# Altium PCB ESC.PcbDoc
Units mil, origin at the board's own origin, x right, y up, seen from the top; angles counter-clockwise.
Board outline 1450.03 x 2040.03 mil, 4 copper layers (Component Side, Ground Plane, Power Plane, Solder Side), stack 33.234 mil thick; 110 components, 77 nets, 463 pads, 385 vias.
Unrouted connection lines stored in the file: 36.
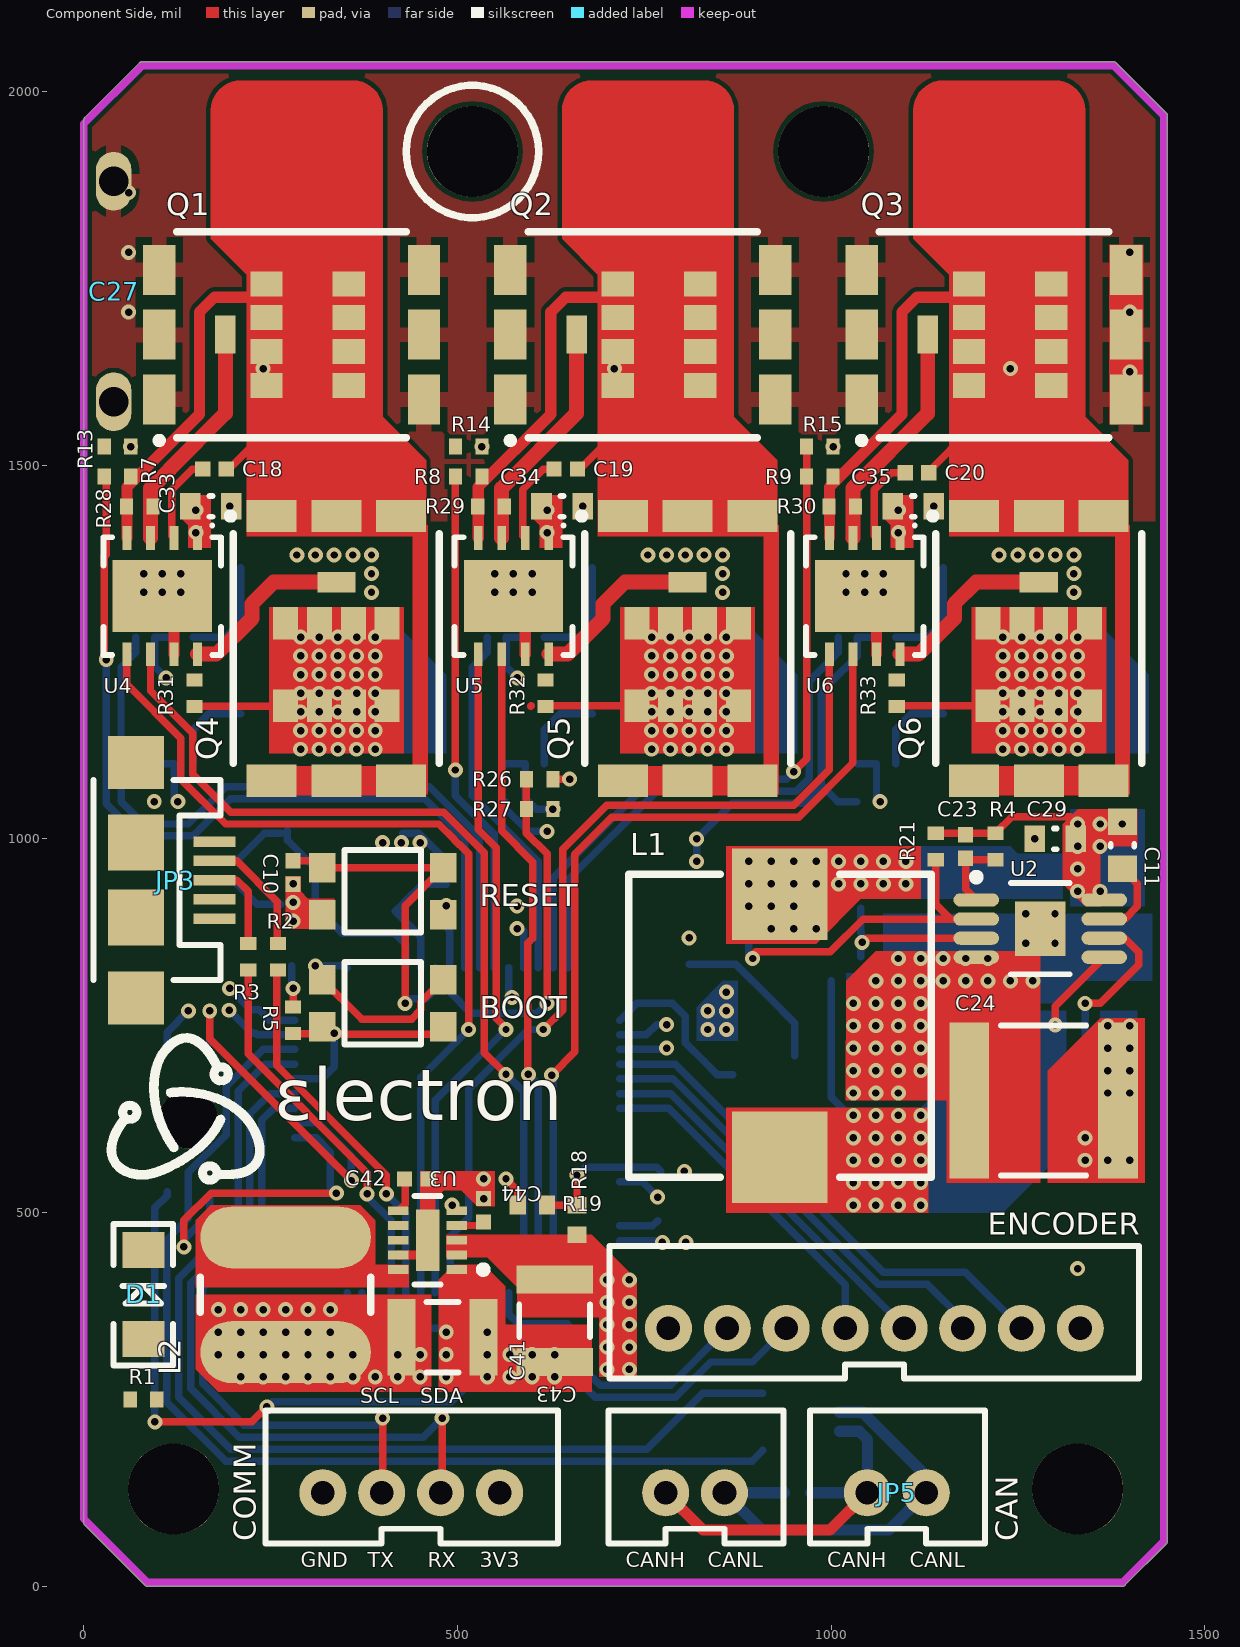
[diagram p0: Component Side view]
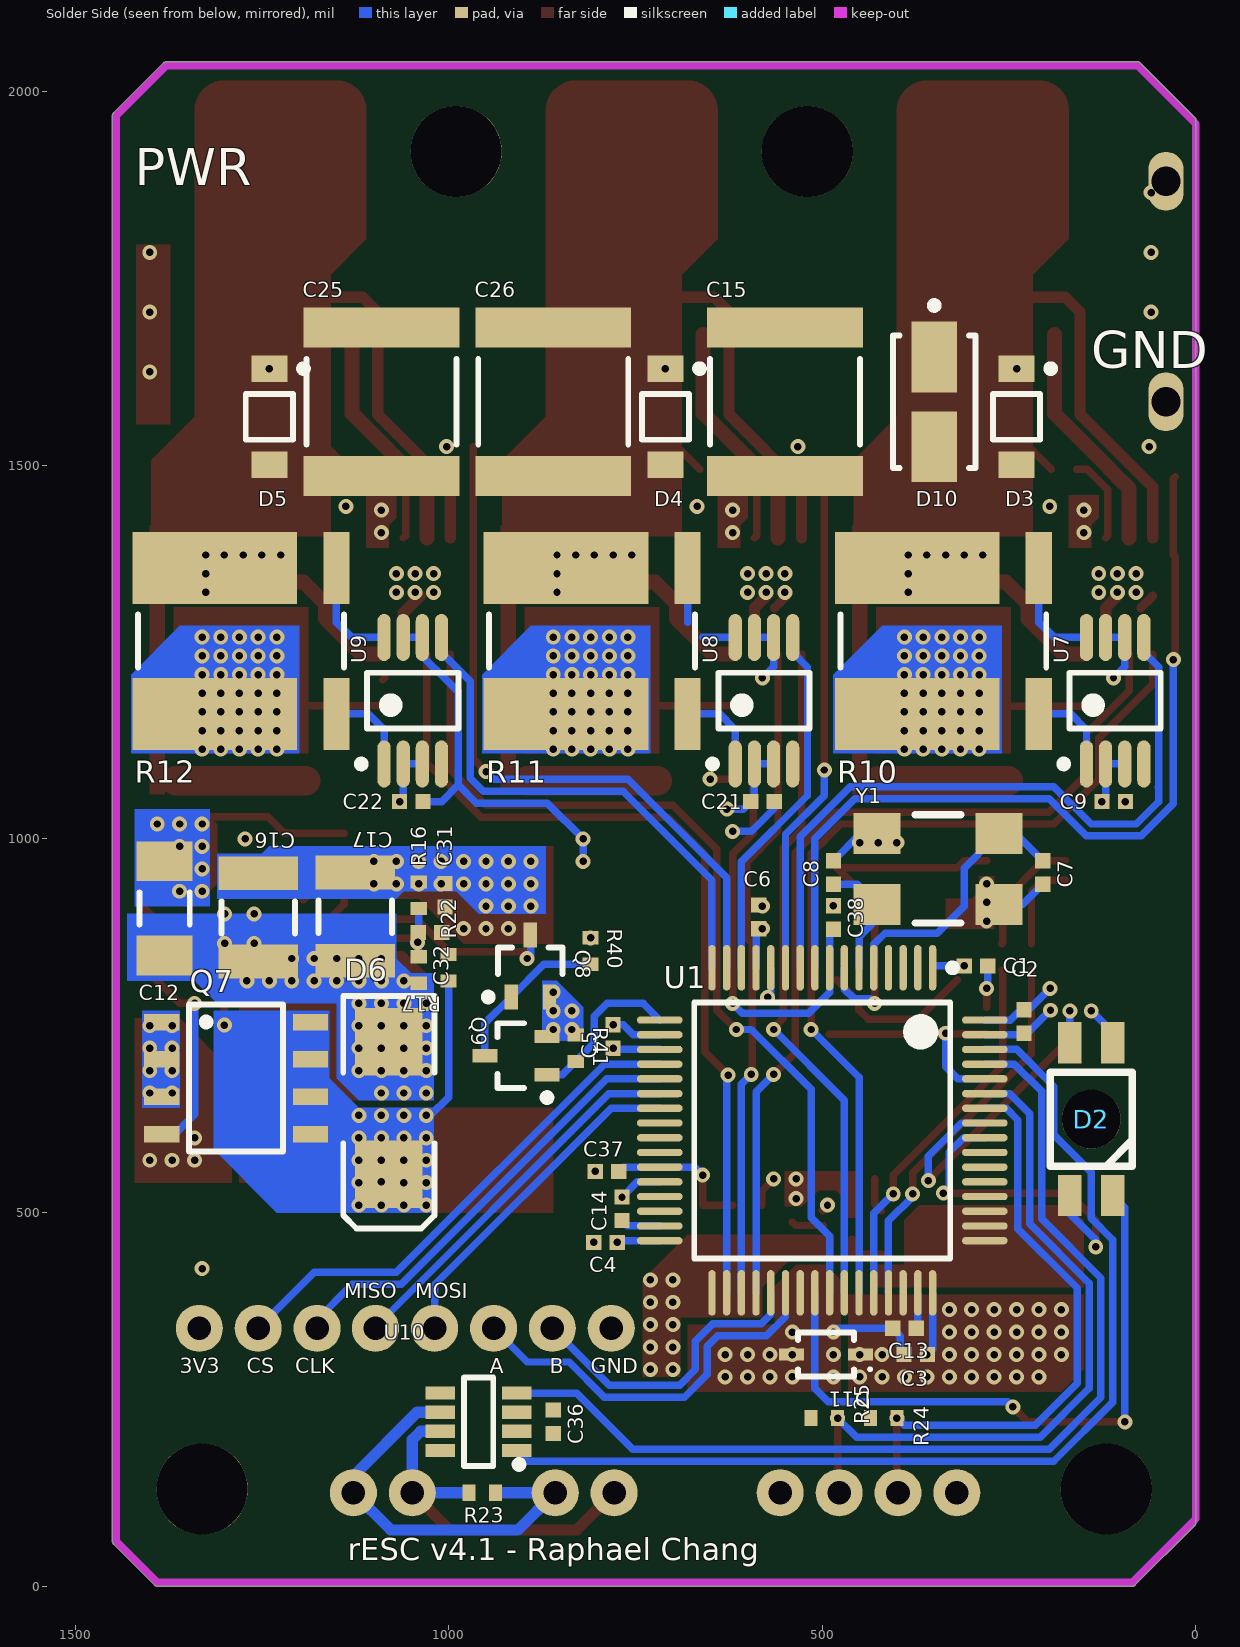
[diagram p1: Solder Side view, seen from below]
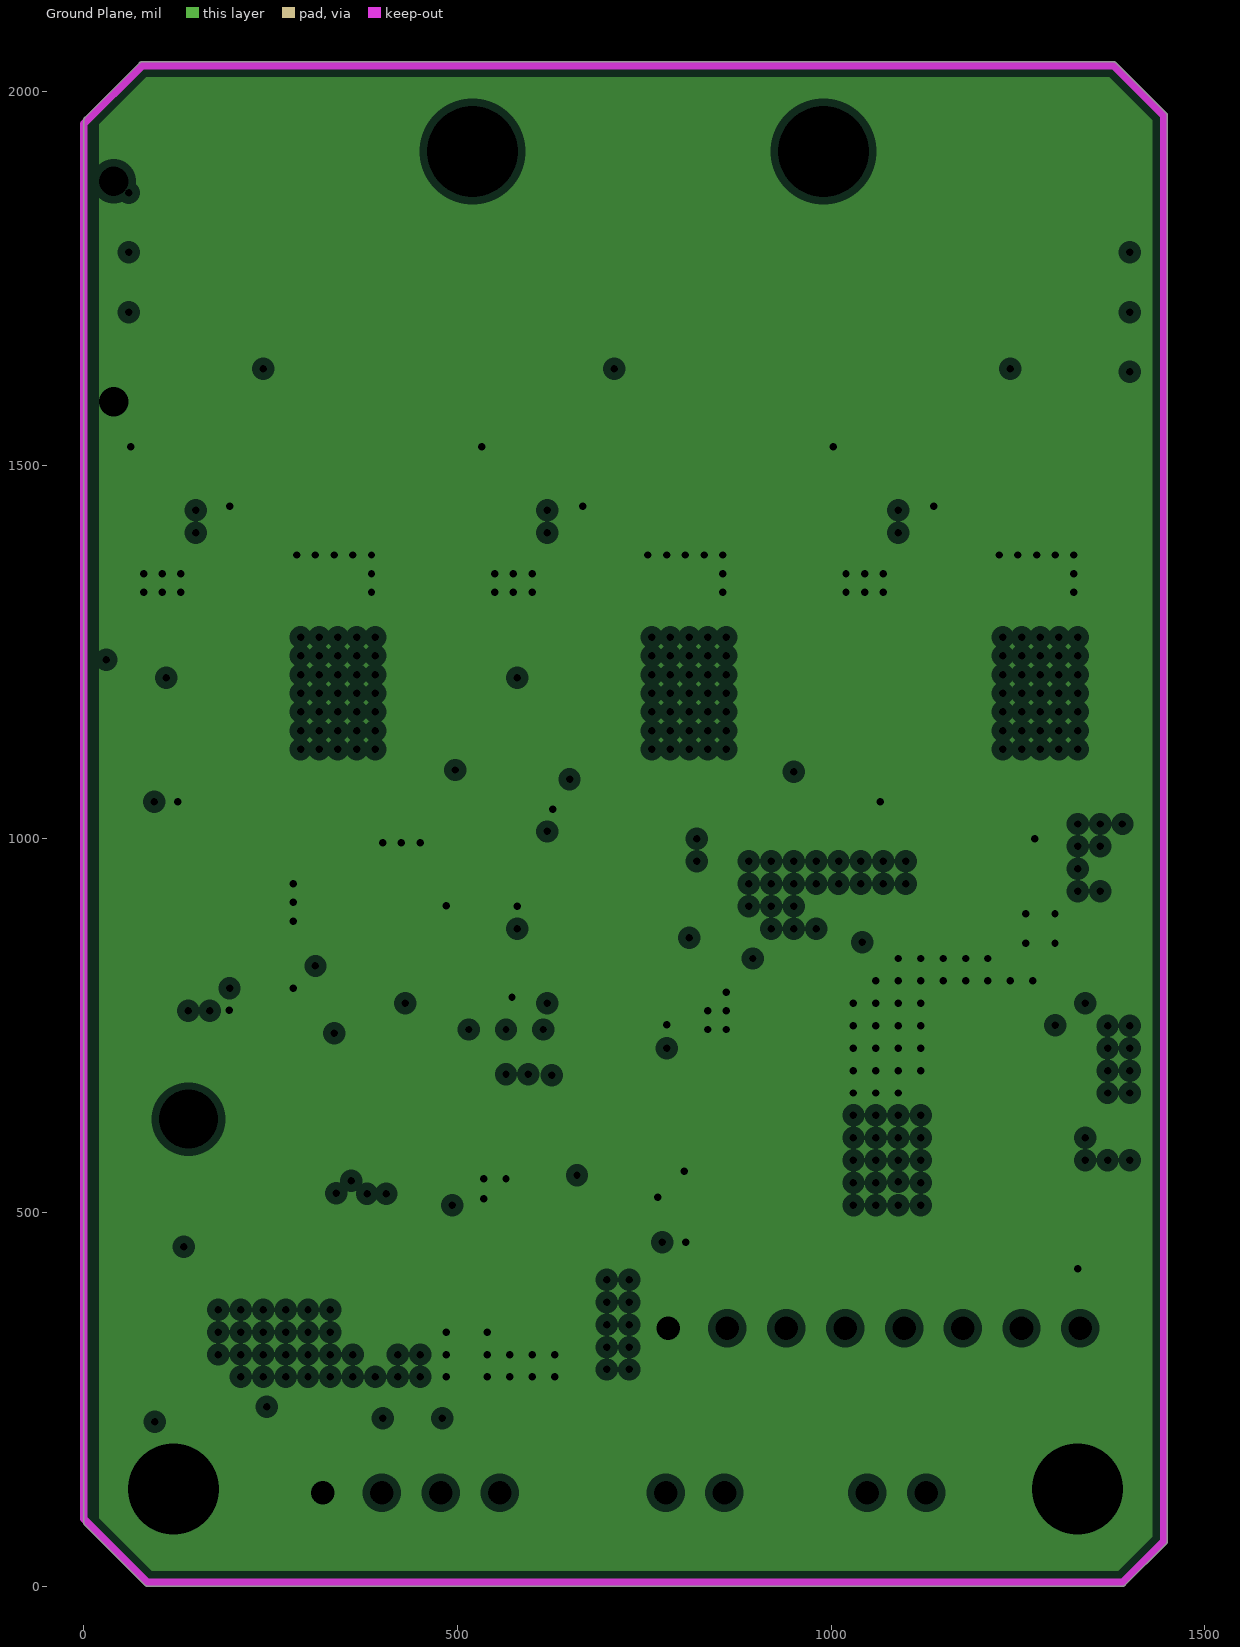
[diagram p2: Ground Plane, clearances drawn from the general rule]
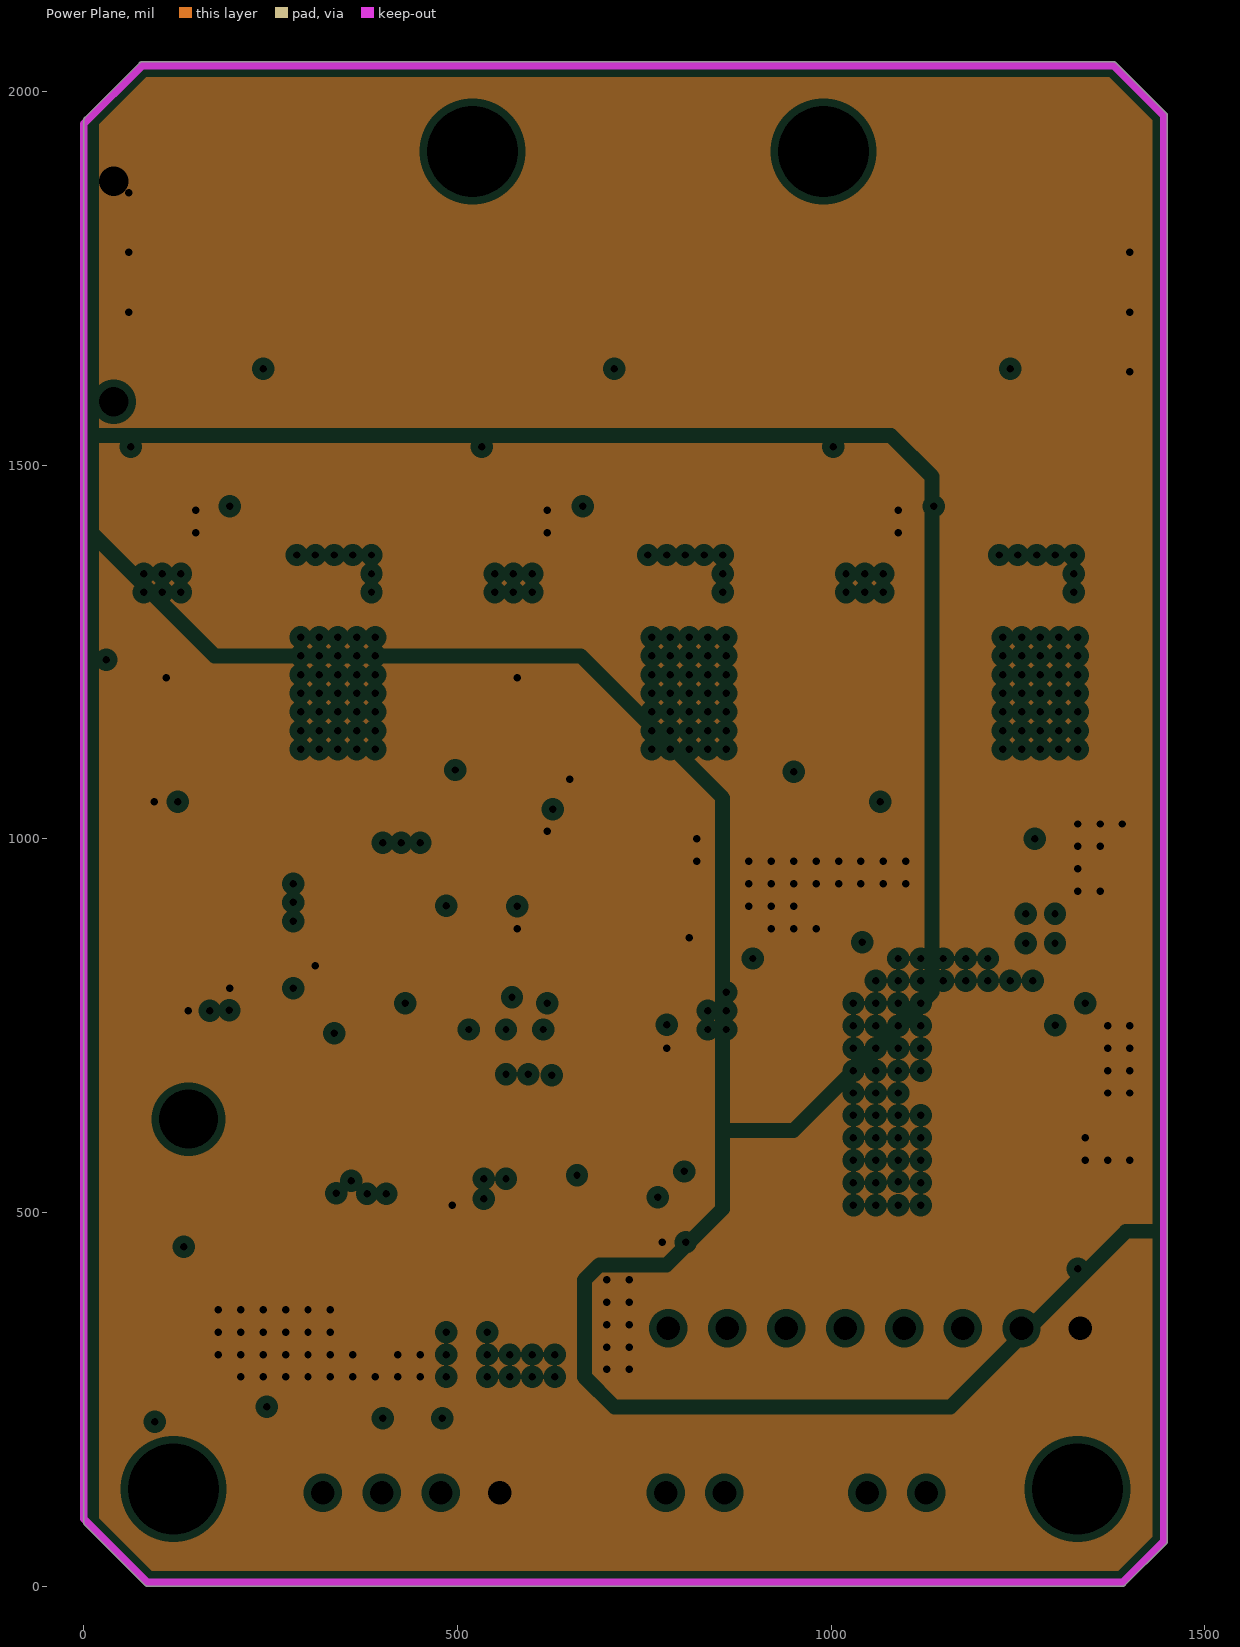
[diagram p3: Power Plane, clearances drawn from the general rule]

## Layer stack, top to bottom
Top Solder: solder mask 0.4, Solder Resist, Dk 3.5
Component Side: signal copper 1.4
Dielectric 1: core 12.6, FR-4, Dk 4.8
Ground Plane: plane copper 1.417, net GND
Dielectric 3: prepreg 5, Dk 4.2
Power Plane: plane copper 1.417, net (Multiple Nets)
Dielectric 4: core 10, Dk 4.2
Solder Side: signal copper 1.4
Bottom Solder: solder mask 0.4, Solder Resist, Dk 3.5

## Board outline
1.45,81.45 1.47,81.44 81.44,1.47 81.45,1.45 81.44,1.47 ccw(c85,5) 85,-0.01 1390,-0.01 ccw(c1390,5) 1393.56,1.47 1393.55,1.45 1448.55,56.45 1448.53,56.44 ccw(c1445,60) 1450.01,60 1450.01,1968.01 ccw(c1445,1968.01) 1448.53,1971.57 1448.55,1971.55 1381.55,2038.55 1381.57,2038.53 ccw(c1378.01,2035) 1378.01,2040.02 78.01,2040.02 ccw(c78.01,2035) 74.45,2038.53 74.46,2038.55 1.45,1965.54 1.47,1965.55 ccw(c5,1961.99) -0.02,1961.99 -0.02,85 ccw(c5,85)

## Design rules (kind name [scope] priority, off if disabled: settings)
Clearance Clearance_2 [All vs OnLayer('Keep-Out Layer')] p1: gap=6
Clearance Clearance_1 [(InPolygon AND InNet('GND'))] p2: gap=8
Clearance [All] p3: gap=6
ComponentClearance [All] p1: gap=10 collisioncheckmode=3 verticalgap=0 showdistances=FALSE
PlaneClearance [All] p1: clearance=10
PlaneConnect PlaneConnect_Via [IsVia] p1: planeconnectstyle=Direct reliefexpansion=20 reliefentries=4 reliefconductorwidth=10 reliefairgap=10
PlaneConnect [All] p2: planeconnectstyle=Relief reliefexpansion=20 reliefentries=4 reliefconductorwidth=20 reliefairgap=10
PolygonConnect PolygonConnect_Via [IsVia] p1: connectstyle=Direct reliefconductorwidth=10 reliefentries=4 polygonreliefangle="90 Angle" airgapwidth=10
PolygonConnect [All] p2: connectstyle=Relief reliefconductorwidth=20 reliefentries=4 polygonreliefangle="90 Angle" airgapwidth=10
RoomDefinition U_12V [InComponentClass('U_12V')] p1: confinementstyle=ConfineIn formatcopy=TRUE lockcomponents=FALSE outline 1390,490 1465,555 1465,1005 1430.03,1041.47 1402.5,1067.5 812.5,1067.5 695,950 695,490
RoomDefinition U_3V3 [InComponentClass('U_3V3')] p2: confinementstyle=ConfineIn formatcopy=TRUE lockcomponents=FALSE outline 750,250 750,470 640,580 90,580 0,490 0,380 130,250
RoomDefinition U_Power [InComponentClass('U_Power')] p3: confinementstyle=ConfineIn formatcopy=TRUE lockcomponents=FALSE outline -65,1025 1495,1025 1495,2125 -65,2125
RoutingVias [All] p1: holewidth=10 width=20 viastyle="Through Hole" minholewidth=10 minwidth=20 maxholewidth=28 maxwidth=50
ShortCircuit ShortCircuit_1 [All vs OnLayer('Keep-Out Layer')] p1: allowed=TRUE
ShortCircuit [All] p2: allowed=FALSE
SolderMaskExpansion SolderMaskExpansion_Via [IsVia] p1: expansion=4 soldermaskfromhole=TRUE
SolderMaskExpansion [All] p2: expansion=4
Width [All] p1: maxlimit=60 minlimit=10 preferedwidth=10
26 further rules are at their usual default settings.

## Classes and differential pairs
component class "Components Class 1": C11 C12 C16 C17 C23 C24 C29 C31 C32 L1 Q7 Q8 Q9 R4 R16 R17 R21 R22 R40 R41 U2
component class U_Connectors: CAN COMM ENCODER JP3 JP5
component class U_12V: C11 C12 C16 C17 C23 C24 C29 C31 C32 L1 Q7 Q8 Q9 R4 R16 R17 R21 R22 R40 R41 U2
component class U_3V3: C41 C42 C43 C44 D11 L2 U3
component class U_MCU: C1 C2 C3 C4 C5 C7 C8 C9 C10 C13 C14 C21 C22 C36 C37 C38 D1 D2 R1 R2 R3 R5 R18 R19 R23 R24 R25 R26 R27 U1 U7 U8 U9 U10 Y1
component class U_Power: C15 C18 C19 C20 C25 C26 C27 C33 C34 C35 D3 D4 D5 D10 Q1 Q2 Q3 Q4 Q5 Q6 R7 R8 R9 R11 R12 R13 R14 R15 R28 R29 R30 R31 R32 R33 U4 U5 U6

## Components (designator, comment, footprint, x,y, rotation, side; value= is the part's Value field where it differs from the comment)
BOOT "" SWITCH 400,780 r180 top (schematic designator SW1)
C1 "2.2uF" CAPC0402(1005)60_L 294.25,830 r0 bottom
C2 "2.2uF" CAPC0402(1005)60_L 230,755.75 r90 bottom
C3 "2.2uF" CAPC0402(1005)60_L 375,310 r180 bottom
C4 "2.2uF" CAPC0402(1005)60_L 790,460 r180 bottom
C5 "2.2uF" CAPC0402(1005)60_L 780,735.75 r270 bottom
C6 "4.7uF" CAPC0402(1005)60_L 585,895.75 r270 bottom
C7 "15pF" CAPC0402(1005)60_L 205,955 r270 bottom
C8 "15pF" CAPC0402(1005)60_L 485,955 r90 bottom
C9 "0.1uF" CAPC0402(1005)60_L 110,1050 r0 bottom
C10 "100nF" CAPC0402(1005)60_L 280,955 r90 top
C11 "0.47uF" CAPC0603(1608)100_N 1390,991.5 r90 top
C12 "10uF" CAPC1206(3216)190_M 1380,907.01 r90 bottom
C13 "2.2uF" CAPC0402(1005)60_L 390,345 r180 bottom
C14 "2.2uF" CAPC0402(1005)60_L 768.01,505 r270 bottom
C15 "15uF" CAPC2220(5750)280_L 550,1585 r90 bottom
C16 "47uF" CAPC1210(3225)280_N 1255,895 r90 bottom
C17 "47uF" CAPC1210(3225)280_N 1125,895.94 r90 bottom
C18 "0.22uF" CAPC0402(1005)60_L 175,1495 r180 top
C19 "0.22uF" CAPC0402(1005)60_L 645,1495 r180 top
C20 "0.22uF" CAPC0402(1005)60_L 1115,1490 r180 top
C21 "0.1uF" CAPC0402(1005)60_L 580,1050 r0 bottom
C22 "0.1uF" CAPC0402(1005)60_L 1050,1050 r0 bottom
C23 "1nF" CAPC0402(1005)60_L 1180,990 r270 top
C24 "22uF" CAPC2220(5750)230_L 1284.51,650 r0 top
C25 "15uF" CAPC2220(5750)280_L 1090,1585 r90 bottom
C26 "15uF" CAPC2220(5750)280_L 860,1585 r90 bottom
C27 "2200uF" BULKCAPACITOR 40,1732.64 r0 top
C29 "1uF" CAPC0603(1608)100_L 1300,1000 r0 top
C31 "10nF" CAPC0402(1005)60_L 1005,924.74 r90 bottom
C32 "0.1uF" CAPC0402(1005)60_L 1025,874.74 r180 bottom
C33 "4.7uF" CAPC0603(1608)100_L 170,1445 r180 top
C34 "4.7uF" CAPC0603(1608)100_L 640,1445 r180 top
C35 "4.7uF" CAPC0603(1608)100_L 1110,1445 r180 top
C36 "0.1uF" CAPC0402(1005)60_L 860,220 r90 bottom
C37 "0.1uF" CAPC0402(1005)60_L 788.01,555 r180 bottom
C38 "2.2uF" CAPC0402(1005)60_L 485,895 r270 bottom
C41 "47uF" CAPC1210(3225)280_L 480,333.01 r180 top
C42 "3.3nF" CAPC0402(1005)60_L 445,545 r180 top
C43 "4.7uF" CAPC1210(3225)210_L 630,355.12 r90 top
C44 "1uF" CAPC0402(1005)60_L 535,503.01 r270 top
CAN "" JST-2-PTH-VERT 818.01,125 r0 top (schematic designator JP4)
COMM "" JST-4-PTH-VERT 438.01,125 r0 top (schematic designator JP1)
D1 "LED-BLUE" LED-1206 80,390 r90 top
D2 "XZMDKCBDDG45S-9" XZMDKCBDDG45S-9 140,625 r270 bottom
D3 "MMSZ5262BT1G" ONSC-SOD-123-2-425-04_V 240,1565 r270 bottom
D4 "MMSZ5262BT1G" ONSC-SOD-123-2-425-04_V 710,1565 r270 bottom
D5 "MMSZ5262BT1G" ONSC-SOD-123-2-425-04_V 1240,1565 r270 bottom
D6 "D Schottky" SMB 1080,640 r270 bottom
D10 "TVS 50V" VISH-DO-214AC-2_N 350,1585 r270 bottom
D11 "SP4020-01FTG" SOD323 495,310 r0 bottom
ENCODER "Encoder" JST-8-PTH-VERT 1058.01,345 r0 top (schematic designator JP2)
JP3 "USB" USB-MICROB 70,945 r270 top
JP5 "" JST-2-PTH-VERT 1088.01,125 r0 top
L1 "SDR0805-180ML" IHLP-4040DZ-51 931.5,750 r90 top
L2 "SDR0805-180ML" SDR0604 270,390 r270 top
Q1 "IRF7749L2" DIRECTFET-9 278.01,1675 r0 top
Q2 "IRF7749L2" DIRECTFET-9 748.01,1675 r0 top
Q3 "IRF7749L2" DIRECTFET-9 1218.01,1675 r0 top
Q4 "IRF7749L2" DIRECTFET-9 338.01,1255 r270 top
Q5 "IRF7749L2" DIRECTFET-9 808.01,1255 r270 top
Q6 "IRF7749L2" DIRECTFET-9 1278.01,1255 r270 top
Q7 "MOSFET-P" SOIC127P600X175-8N 1284.51,680 r180 bottom
Q8 "BSS123W" SOT323-3 890.78,830 r90 bottom
Q9 "BSS123W" SOT323-3 910,710 r0 bottom
R1 "10R" RESC0402(1005)_L 80,250 r0 top
R2 "22R" RESC0402(1005)_L 260,842.28 r270 top
R3 "22R" RESC0402(1005)_L 220,842.28 r270 top
R4 "10K" RESC0402(1005)_L 1220,990 r90 top
R5 "10K" RESC0402(1005)_L 280,757.28 r270 top
R7 "39K" RESC0402(1005)_L 45,1485 r0 top
R8 "39K" RESC0402(1005)_L 515,1485 r0 top
R9 "39K" RESC0402(1005)_L 985,1485 r0 top
R10 "" WSL2726 338.01,1265 r270 bottom
R11 "" WSL2726 808.01,1265 r270 bottom
R12 "" WSL2726 1278.01,1265 r270 bottom
R13 "2K2" RESC0402(1005)_L 45,1525 r180 top
R14 "2K2" RESC0402(1005)_L 515,1525 r180 top
R15 "2K2" RESC0402(1005)_L 985,1525 r180 top
R16 "36K" RESC0402(1005)_L 1040,924.74 r90 bottom
R17 "3K9" RESC0402(1005)_L 1040,824.74 r90 bottom
R18 "200K" RESC0402(1005)_N 660,490 r90 top
R19 "10K" RESC0402(1005)_N 600.31,510 r0 top
R21 "200K" RESC0402(1005)_L 1140,990 r270 top
R22 "154K" RESC0402(1005)_L 1000,827.72 r90 bottom
R23 "120R" RESC0402(1005)_L 955,125 r0 bottom
R24 "4K7" RESC0402(1005)_L 417.72,225 r0 bottom
R25 "4K7" RESC0402(1005)_L 497.28,225 r0 bottom
R26 "NTC_10K" RESC0402(1005)_L 610,1080 r0 top
R27 "10K" RESC0402(1005)_L 610,1040 r180 top
R28 "10K" RESC0402(1005)_L 75,1445 r0 top
R29 "10K" RESC0402(1005)_L 545,1445 r0 top
R30 "10K" RESC0402(1005)_L 1015,1445 r0 top
R31 "10K" RESC0402(1005)_L 148.01,1195 r90 top
R32 "10K" RESC0402(1005)_L 618.01,1195 r90 top
R33 "10K" RESC0402(1005)_L 1088.01,1195 r90 top
R40 "4K7" RESC0402(1005)_L 810,850 r90 bottom
R41 "4K7" RESC0402(1005)_L 830,720 r270 bottom
RESET "" SWITCH 400,930 r0 top (schematic designator SW2)
U1 "STM32F405RGT7TR" STM-LQFP64_L 500,610 r270 bottom
U2 "LM5085QMY/NOPB" MUY08A_N 1280,880 r0 top
U3 "MAX17502EATB+T" MAXM-T1032N+1_V 460,463.01 r180 top
U4 "UCC27211" DFN8 105,1325 r270 top
U5 "UCC27211" DFN8 575,1325 r270 top
U6 "UCC27211" DFN8 1045,1325 r270 top
U7 "AD8418" MSOP-8 108.01,1185 r90 bottom
U8 "AD8418" MSOP-8 578.01,1185 r90 bottom
U9 "AD8418" MSOP-8 1048.01,1185 r90 bottom
U10 "TCAN332" SOT65P280X145-6N 960,220 r0 bottom
Y1 "" ABRA-ABM3B-4_V 345,960 r0 bottom

## Footprints (in the part's own frame and the unit in brackets; to place one, negate y for a bottom-side part, rotate by r counter-clockwise, add the part's x,y. Pads: shape width x height; smd on the part's side, far side on the other; paste and mask are expansions set on the pad)
ABRA-ABM3B-4_V [mil] "SMT Crystal, 4-Leads, Body 5.2x3.4mm"
  rect 63x55 smd: 1(-81.5,-47.5) 2(-81.5,47.5) 2(81.5,-47.5) 3(81.5,47.5)
  silkscreen extent -30,-72 30,72, body extent -114,-52 113,51, height 39
BULKCAPACITOR [mm]
  oval 1.2x2 hole 1: 1(0,3.75) 2(0,-3.75)
  body extent 1.5,-8 36.5,8, height 18
CAPC0402(1005)60_L [mm] "Chip Capacitor, Body 1.0x0.5mm, Height 0.6mm, IPC High Density"
  rect 0.52x0.52 smd: 1(-0.4,0) 2(0.4,0)
  body extent -0.55,-0.3 0.55,0.3, height 0.6
CAPC0603(1608)100_L [mm] "Chip Capacitor, Body 1.6x0.8mm, Height 1.0mm, IPC High Density"
  rect 0.7x0.9 smd: 1(-0.7,0) 2(0.7,0)
  silkscreen extent -0.05,-0.35 0.05,0.35, body extent -0.87,-0.47 0.88,0.48, height 1
CAPC0603(1608)100_N [mm] "Chip Capacitor, Body 1.6x0.8mm, Height 1.0mm, IPC Medium Density"
  rect 0.9x1 smd: 1(-0.8,0) 2(0.8,0)
  silkscreen extent -0.05,-0.4 0.05,0.4, body extent -0.87,-0.48 0.88,0.47, height 1
CAPC1206(3216)190_M [mm] "Chip Capacitor, Body 3.2x1.6mm, Height 1.9mm, IPC Low Density"
  rect 1.35x1.9 smd: 1(-1.6,0) 2(1.6,0)
  silkscreen extent -0.55,-0.85 0.55,0.85, body extent -1.7,-0.9 1.7,0.9, height 1.9
CAPC1210(3225)210_L [mm] "Chip Capacitor, Body 3.2x2.5mm, Height 2.1mm, IPC High Density"
  rect 0.95x2.6 smd: 1(-1.4,0) 2(1.4,0)
  silkscreen extent -0.55,-1.2 0.55,1.2, body extent -1.7,-1.35 1.7,1.35, height 2.1
CAPC1210(3225)280_L [mm] "Chip Capacitor, Body 3.2x2.5mm, Height 2.8mm, IPC High Density"
  rect 0.95x2.6 smd: 1(-1.4,0) 2(1.4,0)
  silkscreen extent -0.55,-1.2 0.55,1.2, body extent -1.7,-1.4 1.7,1.4, height 2.8
CAPC1210(3225)280_N [mm] "Chip Capacitor, Body 3.2x2.5mm, Height 2.8mm, IPC Medium Density"
  rect 1.15x2.7 smd: 1(-1.5,0) 2(1.5,0)
  silkscreen extent -0.55,-1.25 0.55,1.25, body extent -1.7,-1.4 1.7,1.4, height 2.8
CAPC2220(5750)230_L [mm] "Chip Capacitor, Body 5.7x5.0mm, Height 2.3mm, IPC High Density"
  rect 1.35x5.3 smd: 1(-2.525,0) 2(2.525,0)
  silkscreen extent -1.45,-2.55 1.45,2.55, body extent -3.05,-2.7 3.05,2.7, height 2.3
CAPC2220(5750)280_L [mm] "Chip Capacitor, Body 5.7x5.0mm, Height 2.8mm, IPC High Density"
  rect 1.35x5.3 smd: 1(-2.525,0) 2(2.525,0)
  silkscreen extent -1.45,-2.55 1.45,2.55, body extent -3.05,-2.7 3.05,2.7, height 2.8
DFN8 [mm] "SON, 8-Leads, Body 3.00x3.00mm, Pitch 0.65mm, Thermal Pad 2.00x1.47mm, IPC Medium Density"
  rect 0.8x0.3 smd: 1(-1.975,1.2) 2(-1.975,0.4) 3(-1.975,-0.4) 4(-1.975,-1.2) 5(1.975,-1.2) 6(1.975,-0.4) 7(1.975,0.4) 8(1.975,1.2)
  rect 2.45x3.38 smd: 9(0,0)
  silkscreen extent -2.45,-2 2,2, body extent -2,-2 2,2, height 1
DIRECTFET-9 [mm]
  rect 0.7x1.3 smd: 1(-2.25,0)
  rect 1.1x0.85 smd: 2(-0.85,-1.725) 2(-0.85,-0.575) 2(-0.85,0.575) 2(-0.85,1.725) 2(1.95,-1.725) 2(1.95,-0.575) 2(1.95,0.575) 2(1.95,1.725)
  rect 1.1x1.7 smd: 3(-4.5,-2.2) 3(-4.5,0) 3(-4.5,2.2) 3(4.5,-2.2) 3(4.5,0) 3(4.5,2.2)
  silkscreen extent -4.6,-3.7 3.9,3.5, body extent -4.57,-3.55 4.58,3.55, height 0.83
IHLP-4040DZ-51 [mil]
  rect 123x128 smd: 1(-176,0) 2(176,0)
  silkscreen extent -202,-202 202,202, body extent -200,-200 200,200, height 157
JST-2-PTH-VERT [mil]
  round 63 hole 31.5: 1(-39.37,0) 2(39.37,0)
  silkscreen extent -116,-68 118,110, body extent -114,-64 118,113, height 236
JST-4-PTH-VERT [mil]
  round 63 hole 31.5: 1(-118.11,0) 2(-39.37,0) 3(39.37,0) 4(118.37,0)
  silkscreen extent -195,-68 197,110, body extent -195,-67 195,110, height 236
JST-8-PTH-VERT [mil]
  round 63 hole 31.5: 1(-275.59,0) 2(-196.85,0) 3(-118.11,0) 4(-39.11,0) 5(39.89,0) 6(118.11,0) 7(196.85,0) 8(275.59,0)
  silkscreen extent -354,-67 354,110, body extent -352,-67 352,110, height 236
LED-1206 [mil]
  rect 48x56 smd: A(-59.06,0) C(60,0)
  silkscreen extent -94,-39 95,40, body extent -63,-31 63,31, height 43
MAXM-T1032N+1_V [mm] "TDFN, 10-Leads, Body 2x3mm, Pitch 0.50mm, Thermal Pad 0.8x2.08mm"
  rect 0.7x0.3 smd mask+0.076: 1(-0.99,1) 2(-0.99,0.5) 3(-0.99,0) 4(-0.99,-0.5) 5(-0.99,-1) 6(0.99,-1) 7(0.99,-0.5) 8(0.99,0) 9(0.99,0.5) 10(0.99,1)
  rect 0.8x2.08 smd mask+0.076: 11(0,0)
  silkscreen extent -2.01,-1.5 0.45,1.5, body extent -1,-1.5 1,1.5, height 0.8
MSOP-8 [mm] "SOP, 8-Leads, Body 3x3mm, Pitch 0.65mm, IPC Medium Density"
  oval 1.6x0.45 smd: 1(-2.15,0.975) 2(-2.15,0.325) 3(-2.15,-0.325) 4(-2.15,-0.975) 5(2.15,-0.975) 6(2.15,-0.325) 7(2.15,0.325) 8(2.15,0.975)
  silkscreen extent -2.27,-1.55 0.95,1.88, body extent -1.55,-1.55 1.55,1.55, height 0.05
MUY08A_N [mm] "TSOP, 8-Leads, Body 3x3mm, Pitch 0.65mm, Thermal Pad, IPC Medium Density"
  oval 1.55x0.45 smd: 1(-2.175,0.975) 2(-2.175,0.325) 3(-2.175,-0.325) 4(-2.175,-0.975) 5(2.175,-0.975) 6(2.175,-0.325) 7(2.175,0.325) 8(2.175,0.975)
  rect 1.73x1.85 smd: 9(0,0)
  silkscreen extent -2.3,-1.55 1,1.87, body extent -1.55,-1.55 1.55,1.55, height 1.09
ONSC-SOD-123-2-425-04_V [mm] "SOD, 2-Leads, Body 2.69x1.6mm"
  rect 0.91x1.22 smd: 1(-1.635,0) 2(1.635,0)
  silkscreen extent -1.76,-0.8 0.78,1.28, body extent -1.35,-0.8 1.35,0.8, height 1.35
RESC0402(1005)_L [mm] "Chip Resistor, Body 1.0x0.5mm, IPC High Density"
  rect 0.45x0.55 smd: 1(-0.45,0) 2(0.45,0)
  body extent -0.52,-0.27 0.53,0.28, height 0.4
RESC0402(1005)_N [mm] "Chip Resistor, Body 1.0x0.5mm, IPC Medium Density"
  rect 0.55x0.65 smd: 1(-0.5,0) 2(0.5,0)
  body extent -0.52,-0.27 0.53,0.28, height 0.4
SDR0604 [mm]
  rrect100% 2.1x5.8 smd: 1(-1.95,0) 2(1.95,0)
  Component Side region: -2,2.9 -0.9,2.9 -0.9,-2.9 -2,-2.9 -2.5,-2.766 -2.866,-2.4 -3,-1.9 -3,-1.9 -3,1.9 -2.866,2.4 -2.5,2.766 -2,2.9
  Component Side region: 2,2.9 0.9,2.9 0.9,-2.9 2,-2.9 2.5,-2.766 2.866,-2.4 3,-1.9 3,-1.9 3,1.9 2.866,2.4 2.5,2.766 2,2.9
  silkscreen extent -0.6,-2.9 0.6,2.9, body extent -2.75,-2.8 2.75,2.8, height 4.55
SMB [mm] "DO-214-AA/SMB; 2 C-Bend Leads; Body 5.3 x 3.6 mm, inc. leads (LxW)"
  rect 2.3x2.3 smd: 1(-2.25,0) 2(2.25,0)
  silkscreen extent -3.8,-1.55 4.1,1.55
SOD323 [mm] "SODFL, 2-Leads, Body 1.30x2.57mm, IPC Medium Density"
  rect 0.85x0.4 smd: 1(-1.175,0) 2(1.175,0)
  silkscreen extent -1.55,-0.75 0.95,0.75, body extent -0.95,-0.72 0.95,0.72, height 1.14
SOIC127P600X175-8N [mm] "SOIC, 8-Leads, Body 4.90x3.90mm, Pitch 1.27mm, IPC Medium Density"
  rect 1.194x0.56 smd: 1(-2.528,-0.635) 1(-2.528,0.635) 1(-2.528,1.905) 2(-2.528,-1.905) 3(2.527,-1.905) 3(2.527,-0.635) 3(2.527,0.635) 3(2.527,1.905)
  Component Side region: -0.762,2.032 2.286,2.032 2.286,-2.032 -0.762,-2.032
  silkscreen extent -1.6,-2.5 1.6,2.5
SOT65P280X145-6N [mm] "SOT23, 6-Leads, Body 2.90x2.80mm, Pitch 0.65mm, IPC Medium Density"
  rect 1x0.45 smd mask+0.08: 1(-1.3,0.975) 2(-1.3,0.325) 3(-1.3,-0.325) 4(-1.3,-0.975) 5(1.3,-0.975) 6(1.3,-0.325) 7(1.3,0.325) 8(1.3,0.975)
  silkscreen extent -1.5,-1.5 0.5,1.57, body extent -0.88,-1.5 0.87,1.5, height 1.45
SOT323-3 [mm] "SOT23, 3-Leads, Body 2.00x2.10mm, Pitch 0.65mm, IPC Medium Density"
  rect 0.85x0.45 smd: 1(-1.055,0.65) 2(-1.055,-0.65) 3(1.055,0)
  silkscreen extent -1.18,-1.1 0.63,1.55, body extent -0.63,-1.1 0.63,1.1, height 1
STM-LQFP64_L [mm] "Thin QFP, 64-Leads, Body 10x10mm, Pitch 0.5mm, IPC High Density"
  oval 1.55x0.25 smd: 1(-5.525,3.75) 2(-5.525,3.25) 3(-5.525,2.75) 4(-5.525,2.25) 5(-5.525,1.75) 6(-5.525,1.25) 7(-5.525,0.75) 8(-5.525,0.25) 9(-5.525,-0.25) 10(-5.525,-0.75) 11(-5.525,-1.25) 12(-5.525,-1.75) 13(-5.525,-2.25) 14(-5.525,-2.75) 15(-5.525,-3.25) 16(-5.525,-3.75) 33(5.525,-3.75) 34(5.525,-3.25) 35(5.525,-2.75) 36(5.525,-2.25) 37(5.525,-1.75) 38(5.525,-1.25) 39(5.525,-0.75) 40(5.525,-0.25) 41(5.525,0.25) 42(5.525,0.75) 43(5.525,1.25) 44(5.525,1.75) 45(5.525,2.25) 46(5.525,2.75) 47(5.525,3.25) 48(5.525,3.75)
  oval 0.25x1.55 smd: 17(-3.75,-5.525) 18(-3.25,-5.525) 19(-2.75,-5.525) 20(-2.25,-5.525) 21(-1.75,-5.525) 22(-1.25,-5.525) 23(-0.75,-5.525) 24(-0.25,-5.525) 25(0.25,-5.525) 26(0.75,-5.525) 27(1.25,-5.525) 28(1.75,-5.525) 29(2.25,-5.525) 30(2.75,-5.525) 31(3.25,-5.525) 32(3.75,-5.525) 49(3.75,5.525) 50(3.25,5.525) 51(2.75,5.525) 52(2.25,5.525) 53(1.75,5.525) 54(1.25,5.525) 55(0.75,5.525) 56(0.25,5.525) 57(-0.25,5.525) 58(-0.75,5.525) 59(-1.25,5.525) 60(-1.75,5.525) 61(-2.25,5.525) 62(-2.75,5.525) 63(-3.25,5.525) 64(-3.75,5.525)
  silkscreen extent -5.65,-4.35 4.35,4.55, body extent -5,-5 5,5, height 1.6
SWITCH [mm]
  rect 0.9x1 smd: 1(-2.05,0.8) 2(2.05,0.8) 3(-2.05,-0.8) 4(2.05,-0.8)
  silkscreen extent -1.3,-1.4 1.3,1.4, body extent -2.3,-1.4 2.3,1.4, height 1.9
USB-MICROB [mil]
  rect 14x56 smd: D+(0,105) D-(-25.59,105) GND(52,105) ID(26,105) VBUS(-51.18,105)
  rect 71x75 smd: MT1(-157.48,0) MT2(158,0)
  rect 75x75 smd: P$1(-50,0) P$2(50,0)
  silkscreen extent -134,-57 134,113, body extent -157,-98 157,115, height 112
VISH-DO-214AC-2_N [mm] "DO-214AC, 2-Leads, Body 4.5x2.79mm, IPC Medium Density"
  rect 2.4x1.55 smd: 1(-1.525,0) 2(1.525,0)
  silkscreen extent -3.4,-1.4 2.25,1.4, body extent -2.25,-1.4 2.25,1.39, height 2.29
WSL2726 [mm]
  rect 2.44x5.6 smd: 1(-2.48,-0.89) 2(2.48,-0.89)
  rect 2.44x0.89 smd: 3(-2.48,3.245) 4(2.48,3.245)
  silkscreen extent -0.9,-3.5 0.9,3.5
XZMDKCBDDG45S-9 [mm]
  round 2 hole 2 paste+0 mask+0: 0(0,0)
  rect 1.4x0.8 smd: 1(2.6,0.725) 2(-2.6,0.725) 3(-2.6,-0.725) 4(2.6,-0.725)
  silkscreen extent -1.6,-1.4 1.6,1.4

## Part data
BOOT RESET: library part DIPT-DTSM-6, "Switch, SPNO Push Button SMD"
C1 C2 C3 C4 C5 C13 C14 C38: library part CMP-1034-02125-1, "CAP 2.2uF 6.3V ±10% 0402 (1005 Metric) Thickness 0.6mm SMD"
C6: library part CMP-1034-02136-1, "CAP 4.7uF 6.3V ±10% 0402 (1005 Metric) Thickness 0.6mm SMD"
C7 C8: library part CMP-1034-01906-1, "CAP 15nF 6.3V ±10% 0402 (1005 Metric) Thickness 0.6mm SMD"
C9 C10 C21 C22 C36 C37: library part CMP-1034-02060-1, "CAP 100nF 6.3V ±5% 0402 (1005 Metric) Thickness 0.6mm SMD"
C11: library part CMP-1035-02708-1, "CAP 470nF 50V ±10% 0603 (1608 Metric) Thickness 1mm SMD"
C12: library part CMP-1037-04982-1, "CAP 10uF 50V ±10% 1206 (3216 Metric) Thickness 1.9mm SMD"
C15 C25 C26: library part CMP-1042-00760-1, "CAP 4.7uF 100V ±10% 2220 (5750 Metric) Thickness 2.8mm SMD"
C16 C17: library part CMP-1038-02295-1, "CAP 47uF 16V ±10% 1210 (3225 Metric) Thickness 2.8mm SMD"
C18 C19 C20: library part CMP-1034-02089-1, "CAP 220nF 16V ±10% 0402 (1005 Metric) Thickness 0.6mm SMD"
C23: library part CMP-1034-01624-1, "CAP 1nF 50V ±1% 0402 (1005 Metric) Thickness 0.6mm SMD"
C24: library part CMP-1042-00782-1, "CAP 22uF 50V -20% to +80% 2220 (5750 Metric) Thickness 2.2mm SMD"
C27: library part "CAP 2200uF", "Polarized Capacitor (Axial)"
C29: library part CMP-1035-02745-1, "CAP 1uF 50V ±10% 0603 (1608 Metric) Thickness 1mm SMD"
C31: library part CMP-1034-01885-1, "CAP 10nF 50V ±5% 0402 (1005 Metric) Thickness 0.6mm SMD"
C32: library part CMP-1034-02077-1, "CAP 100nF 50V ±10% 0402 (1005 Metric) Thickness 0.6mm SMD"
C33 C34 C35: library part CMP-1035-02788-1, "CAP 4.7uF 16V ±10% 0603 (1608 Metric) Thickness 1mm SMD"
C41: library part CMP-1038-02290-1, "CAP 47uF 6.3V ±10% 1210 (3225 Metric) Thickness 2.8mm SMD"
C42: library part CMP-1034-01765-1, "CAP 3.3nF 6.3V ±5% 0402 (1005 Metric) Thickness 0.6mm SMD"
C43: library part CMP-1038-02103-1, "CAP 2.2uF 100V ±10% 1210 (3225 Metric) Thickness 2.1mm SMD"
C44: library part CMP-1034-02113-1, "CAP 1uF 6.3V ±10% 0402 (1005 Metric) Thickness 0.6mm SMD"
CAN JP5: library part JST_2_VERT
COMM: library part JST_4_VERT
D1: library part LED-BLUE1206
D3 D4 D5: library part CMP-1060-00504-1, "Zener Voltage Regulator, 500 mW, 2-Pin SOD-123, Pb-Free, Tape and Reel"
D6: "Schottky Diode"
D10: library part CMP-0548-00253-1, "Transient Voltage Suppressor, 6.40 to 231 V, 45 V Stand-off Voltage, Uni-Directional, -55 to 155 degC, 2-pin DO-214AC, Pb-Free, Tape and Reel"
ENCODER: library part JST_8_VERT
JP3: library part USB_MICROB_PLUG-SMT
L1 L2: "Inductor"
Q1 Q2 Q3 Q4 Q5 Q6: "N-Channel MOSFET"
Q7: "P-Channel MOSFET"
Q8 Q9: library part MOSFET-N, "N-Channel MOSFET"
R1: library part CMP-1011-00026-1, "10R 0.063W 5% 0402 (1005 Metric)  SMD"
R2 R3: library part CMP-1011-00034-1, "22R 0.063W 5% 0402 (1005 Metric)  SMD"
R4 R26 R27: library part CMP-1011-00623-1, "10K 0.063W 1% 0402 (1005 Metric)  SMD"
R5 R19 R28 R29 R30 R31 R32 R33: library part CMP-1011-00098-1, "10K 0.063W 5% 0402 (1005 Metric)  SMD"
R7 R8 R9: library part CMP-1011-00112-1, "39K 0.063W 5% 0402 (1005 Metric)  SMD"
R10 R11 R12: library part WSL27261L000FEB, "Resistor"
R13 R14 R15: library part CMP-1011-00082-1, "2K2 0.063W 5% 0402 (1005 Metric)  SMD"
R16: library part CMP-1011-00685-1, "36K 0.063W 1% 0402 (1005 Metric)  SMD"
R17: library part CMP-1011-00576-1, "3K9 0.063W 1% 0402 (1005 Metric)  SMD"
R18: library part CMP-1011-00091-1, "5K1 0.063W 5% 0402 (1005 Metric)  SMD"
R21: library part CMP-1011-00768-1, "200K 0.063W 1% 0402 (1005 Metric)  SMD"
R22: library part CMP-1011-00755-1, "154K 0.063W 1% 0402 (1005 Metric)  SMD"
R23: library part CMP-1011-00052-1, "120R 0.063W 5% 0402 (1005 Metric)  SMD"
R24 R25 R40 R41: library part CMP-1011-00090-1, "4K7 0.063W 5% 0402 (1005 Metric)  SMD"
U1: library part CMP-0243-00089-2, "ARM Cortex-M4 32-bit MCU+FPU, 210 DMIPS, 1024 kB Flash, 192 kB Internal RAM, 51 I/Os, 64-pin LQFP, -40 to 105 degC, Tape and Reel"
U2: library part CMP-0069-01314-2, "75V Constant On-Time PFET Buck Switching Controller, 8-pin eMSOP, Pb-Free"
U3: library part CMP-1264-00005-1, "Ultra-Small, High-Efficiency, Synchronous Step-Down DC-DC Converter, 4.5 to 60 V, 1 A, -40 to 125 degC, 10-Pin TDFN (T1032N+1), RoHS, Tape and Reel"
Y1: library part ABRA-ABM3B-4

## Free pads (board coordinates)
  round 122.05 hole 122.05: 0(120,130) 0(520,1920) 1(990,1920) 1(1330,130)

## Via types
v1: diameter 20, hole 10, Component Side to Solder Side, 385 vias

## Nets (pads, with @x,y where several pads share a name; then routed paths per layer and width w, separated by ;. In a path a pad name is that pad's centre, name@x,y a point inside that pad or via, vN(x,y) a via of type N, cw(c..) or ccw(c..) an arc to the next point about the centre after c; other vN are vias at no path point)
12V: C16.2 C17.2 C31.2 C33.2 C34.2 C35.2 L1.2 R16.2 U4.1 U5.1 U6.1 | length 88.6
  Component Side w10: L1.2@934.51,926 L1.2@972.79,926
  Component Side w12: C33.2@140.45,1445 C33.2@145.25,1440.2 ; C35.2@1080.45,1445 C35.2@1085.25,1440.2
  Component Side w20: L1.2@908.51,900 L1.2@934.51,926
  other v1: 920,880 950,880 980,880 890,910 920,910 950,910 890,940 920,940 950,940 980,940 1010,940 1040,940 1070,940 1100,940 890,970 920,970 950,970 980,970 1010,970 1040,970 1070,970 1100,970 150,1410 620,1410 1090,1410 150,1440 620,1440 1090,1440
C1: U1.10 U7.5 | length 944
  Solder Side w10: U7.5 69.62,1249.92 49.76,1230.07 49.76,1069.49 50.12,1069.14 50,1069.02 50,1050 80,1020 140,1020 190,1070 462.63,1070 529.53,1003.1 U1.10
C2: U1.14 U8.5 | length 487
  Solder Side w10: U8.5 539.62,1249.62 519.76,1229.76 519.76,1058.12 608.27,969.61 U1.14
C3: U1.16 U9.5 | length 701.6
  Solder Side w10: U1.16 647.64,945.01 766.63,1064 953.7,1064 971,1081.3 971,1211 1009.62,1249.62 U9.5
CAN_RX: U1.61 U10.4 | length 1374.8
  Solder Side w10: U1.61 242.86,698.58 206.37,662.09 206.37,491.62 127,412.25 127,253 196.5,183.5 753.5,183.5 828.39,258.39 U10.4
CAN_TX: U1.62 U10.1 | length 1404.2
  Solder Side w10: U1.62 239.92,718.27 190.37,668.72 190.37,604.14 140,553.77 140,492.32 111,463.32 111,246.37 189.87,167.5 894.7,167.5 U10.1
CANH: CAN.1 JP5.1 R23.2 U10.7 | length 500.7
  Component Side w15: CAN.1 828.64,75 998.64,75 JP5.1
  Solder Side w15: R23.2 JP5.1 1048.64,196.36 1037.8,207.2 U10.7
CANL: CAN.2 JP5.2 R23.1 U10.6 | length 565.4
  Solder Side w15: R23.1 CAN.2 907.38,75 1077.38,75 JP5.2 1127.38,147.62 1042.2,232.8 U10.6
CLK: ENCODER.6 U1.21 | length 603.9
  Solder Side w10: U1.21 788.47,678.9 1063.37,404 1129,404 1176.12,356.88 ENCODER.6
CS: ENCODER.7 U1.20 | length 683.8
  Solder Side w10: U1.20 791.42,698.58 1070,420 1179.86,420 ENCODER.7
GHA: Q1.1 R28.2 U4.3 | length 314.2
  Component Side w20: U4.3 89.25,1469.35 96.66,1476.76 97.45,1476.76 115.41,1494.72 115.41,1495.51 189.43,1569.52 Q1.1
GHB: Q2.1 R29.2 U5.3 | length 313.7
  Component Side w20: U5.3 559.25,1469.35 659.43,1569.52 Q2.1
GHC: Q3.1 R30.2 U6.3 | length 313.7
  Component Side w20: U6.3 1029.25,1469.35 1129.43,1569.52 Q3.1
GLA: Q4.1 R31.2 U4.8 | length 227.2
  Component Side w20: U4.8 177.24,1247.24 225,1295 225,1314.6 253.98,1343.58 Q4.1@328.01,1343.58
GLB: Q5.1 R32.2 U5.8 | length 227.2
  Component Side w20: U5.8 647.24,1247.24 695,1295 695,1314.6 723.98,1343.58 Q5.1@798.01,1343.58
GLC: Q6.1 R33.2 U6.8 | length 231
  Component Side w10: R33.2@1085.25,1215.47 R33.2
  Component Side w20: U6.8 1117.24,1247.24 1165,1295 1165,1314.6 1193.98,1343.58 Q6.1@1268.01,1343.58
GND: C1.1 C2.1 C3.1 C4.1 C5.1 C6.1 C7.2 C8.2 C9.2 C10.1 C12.1 C13.1 C14.1 C15.1 C16.1 C17.1 C21.2 C22.2 C24.1 C25.1 C26.1 C27.2 C29.1 C33.1 C34.1 C35.1 C36.1 C37.1 C38.1 C41.1 C42.1 C43.1 C44.1 COMM.1 D1.C D3.2 D4.2 D5.2 D6.1 D10.2 D11.2 ENCODER.1 JP3.GND JP3.MT1 JP3.MT2 JP3.P$1 JP3.P$2 pad.0@120,130 pad.1@1330,130 Q8.2 Q9.2 R5.1 R10.1 R11.1 R12.1 R13.1 R14.1 R15.1 R17.1 R19.1 R27.1 R41.1 RESET.3 RESET.4 U1.12 U1.18 U1.28 U1.63 U2.4 U2.9 U3.1 U3.9 U3.11 U4.7 U4.9 U5.7 U5.9 U6.7 U6.9 U7.2 U7.3 U8.2 U8.3 U9.2 U9.3 U10.2 Y1.2 | length 1293.8
  Component Side w10: R5.1 v1(280,800) ; v1(565,545) 580.63,529.37 R19.1
  Component Side w12: U4.9@58.01,1325 U4.9@73.76,1309.25 ; U3.9 460,443.32 U3.11 ; U5.9@548.01,1325 U5.9@563.76,1309.25
  Component Side w15: U4.9 120.75,1309.25 U4.7 ; U5.9 590.75,1309.25 U5.7 ; U6.9@1038.01,1325 1060.75,1302.26 U6.7
  Solder Side w10: U7.3 U7.2 120.8,1054.94 v1(125.75,1050) ; v1@195,771.22 v1(194.54,770.76) 194.71,770.76 225.47,740 C2.1 232.05,737.95 U1.63 ; C7.2 231.75,912.5 Y1.2@263.5,912.5 ; C1.1 278.5,801.5 v1(280,800) ; C3.1 395.49,314.74 395.49,334.74 C13.1 480,345 v1(485,340) ; Y1.2@426.5,1007.5 448.25,1007.5 C8.2 ; U8.3 U8.2 590.8,1054.94 C21.2 605.75,1040 v1(627.72,1040) ; U1.12 568.9,791.1 572.07,787.93 v1(573,787.93) v1@570.92,790 ; C6.1@578.48,905.75 C6.1@583.01,905.75 ; v1(580,910) C6.1@580,913.98 ; U1.28 747.65,541.1 v1(768.01,520.75) ; U1.18 752.95,737.95 766.5,751.5 v1(780,751.5) ; U9.3 U9.2 1060.8,1054.94 v1(1065.75,1050)
  Solder Side w20: 1304.19,870.31 1304.19,889.68
  other v1: 485,280 540,280 570,280 600,280 630,280 485,310 540,310 570,310 600,310 630,310 540,340 1330,425 805.75,460 535,518.76 535,545 803.76,555 1030,660 1060,660 1090,660 1030,690 1060,690 1090,690 1120,690 1030,720 1060,720 1090,720 1120,720 835,745 860,745 1030,750 1060,750 1090,750 1120,750 835,770 860,770 1030,780 1060,780 1090,780 1120,780 860,795 1060,810 1090,810 1120,810 1150,810 1180,810 1210,810 1240,810 1270,810 1090,840 1120,840 1150,840 1180,840 1210,840 1260.31,860.31 1299.68,860.31 280,890 1260.31,899.68 1299.68,899.68 485,910.75 280,915 280,940 400,995 425,995 450,995 1272.44,1000 80,1330 105,1330 130,1330 385,1330 550,1330 575,1330 600,1330 855,1330 1020,1330 1045,1330 1070,1330 1325,1330 80,1355 105,1355 130,1355 385,1355 550,1355 575,1355 600,1355 855,1355 1020,1355 1045,1355 1070,1355 1325,1355 285,1380 310,1380 335,1380 360,1380 385,1380 755,1380 780,1380 805,1380 830,1380 855,1380 1225,1380 1250,1380 1275,1380 1300,1380 1325,1380 195.57,1445 667.56,1445 1137.56,1445 62.72,1525 532.72,1525 1002.72,1525
LED_B: D2.3 U1.57 | length 475.1
  Component Side w10: v1(168.54,770) 168.54,732.46 358,543 v1(358,542.77)
  Solder Side w10: D2.3 v1(168.54,770) ; U1.57 313.84,619.84 358,575.69 v1(358,542.77)
LED_G: D2.4 U1.56 | length 452.8
  Component Side w10: v1@135,453 v1(134,454) 134,489.56 170.44,526 v1(338,526)
  Solder Side w10: v1(134,454) 134,463.69 168.54,498.23 D2.4 ; U1.56 310.9,600.16 330,581.06 330,534 v1(338,526)
LED_R: D2.1 U1.40 | length 875.5
  Component Side w10: v1(95,220) 225,220 v1(245,240)
  Solder Side w10: v1(95,220) 95,506.18 D2.1 D2.1@111.46,527.64 ; v1(245,240) 251.83,246.83 491.83,246.83 509.84,264.84 U1.40
MISO: ENCODER.5 U1.22 | length 511.6
  Solder Side w10: U1.22 785.53,659.21 1097.9,346.85 ENCODER.5
MOSI: ENCODER.4 U1.23 | length 457.5
  Solder Side w10: U1.23 782.59,639.53 1018.9,403.22 ENCODER.4
NetC7_1: C7.1 U1.5 Y1.1 | length 363.7
  Solder Side w10: C7.1 241.75,1007.5 Y1.1 ; Y1.1@272.44,1010.75 272.44,998.56 310,961 310,910 346,874 416,874 431.1,858.9 U1.5
NetC8_1: C8.1 U1.6 Y1.3 | length 169
  Solder Side w10: Y1.3 417,903 450.79,869.21 U1.6 ; Y1.3@429,915 453.25,939.25 C8.1
NetC10_2: C10.2 RESET.1 RESET.2 U1.7 | length 483.8
  Component Side w10: C10.2 310.04,970.75 RESET.1 RESET.2 430,910.79 v1(430,780)
  Solder Side w10: v1(430,780) 436.01,786.01 457.38,786.01 470.47,799.1 U1.7
NetC11_1: C11.1 U2.7 | length 109.8
  Component Side w10: U2.7 1392.8,892.8 1410,910 1410,940 C11.1
NetC13_2: C13.2 U1.47 | length 48.4
  Solder Side w10: U1.47 372.05,347.2 C13.2
NetC14_2: C14.2 U1.31 | length 53.5
  Solder Side w10: U1.31 760.8,482.05 C14.2
NetC18_2: C18.2 U4.2 | length 118.9
  Component Side w10: U4.2 117.66,1405.84 117.66,1467.27 145.39,1495 C18.2
NetC19_2: C19.2 U5.2 | length 122.1
  Component Side w10: U5.2 587.66,1405.84 587.66,1467.66 615,1495 C19.2 C19.2@632.26,1495
NetC20_2: C20.2 U6.2 | length 116.8
  Component Side w10: U6.2 1057.66,1405.84 1057.66,1467.27 1080.39,1490 C20.2
NetC23_2: C23.2 R4.1 U2.1 | length 105.4
  Component Side w10: U2.1 1180,932.76 C23.2 1181.97,972.28 R4.1 R4.1@1218.03,974.25
NetC31_1: C31.1 C32.2 R22.2
NetC32_1: C32.1 R16.1 R17.2 U2.3 | length 219.8
  Component Side w10: v1(1041.47,861.47) 1047.2,867.2 U2.3
  Solder Side w10: R17.2 R17.2@1040,850.94 ; C32.1@1040,874.74 R16.1 ; R17.2@1040.75,850.94 C32.1
NetC37_2: C37.2 R18.2 R19.2 U1.27 | length 199.6
  Component Side w10: R19.2 659.68,510 R18.2 v1(660,550)
  Solder Side w10: v1(660,550) 670.79,560.79 U1.27 766.47,560.79 C37.2
NetC38_2: C38.2 R26.1 R27.2 U1.8 | length 546.1
  Component Side w10: R26.1 R27.2 592.28,1007.72 620,980 v1(620,780)
  Solder Side w10: C38.2@488.17,878.17 490,880 490,827.68 U1.8 490.16,794.84 518.07,766.93 606.93,766.93 v1(620,780)
NetC42_2: C42.2 U3.6 | length 46.3
  Component Side w10: U3.6 430,511.36 C42.2@430,545
NetC44_2: C44.2 U3.4 | length 42.9
  Component Side w10: U3.4 535.43,482.69 C44.2@540,487.26
NetD1_A: D1.A R1.1
NetD6_2: D6.2 L1.1 Q7.3 R22.1 U2.5 | length 313.7
  Component Side w10: v1(1300,750.74) 1300,775.98 U2.5
  Solder Side w10: R22.1 1000,654.44 1024.44,630 v1(1030,630)
  other v1: 1030,510 1060,510 1090,510 1120,510 1030,540 1060,540 1120,540 1090,541.42 1030,570 1060,570 1090,570 1120,570 1030,600 1060,600 1090,600 1120,600 1060,630 1090,630 1120,630
NetL2_1: L2.1 U3.10
NetQ4_2: Q4.2 R10.2 R31.1 | length 121.1
  Component Side w10: R31.1 Q4.2@269.15,1177.28
  other v1: 290,1120 315,1120 340,1120 365,1120 390,1120 290,1145 315,1145 340,1145 365,1145 390,1145 290,1170 315,1170 340,1170 365,1170 390,1170 290,1195 315,1195 340,1195 365,1195 390,1195 290,1220 315,1220 340,1220 365,1220 390,1220 290,1245 315,1245 340,1245 365,1245 390,1245 290,1270 315,1270 340,1270 365,1270 390,1270
NetQ5_2: Q5.2 R11.2 R32.1 | length 122.5
  Component Side w10: 598.01,1177.28 598.95,1178.23 ; R32.1@618.95,1178.23 Q5.2@740.1,1178.23
  other v1: 760,1120 785,1120 810,1120 835,1120 860,1120 760,1145 785,1145 810,1145 835,1145 860,1145 760,1170 785,1170 810,1170 835,1170 860,1170 760,1195 785,1195 810,1195 835,1195 860,1195 760,1220 785,1220 810,1220 835,1220 860,1220 760,1245 785,1245 810,1245 835,1245 860,1245 760,1270 785,1270 810,1270 835,1270 860,1270
NetQ6_2: Q6.2 R12.2 R33.1 | length 122.5
  Component Side w10: R33.1 1088.95,1178.23 Q6.2@1210.1,1178.23
  other v1: 1230,1120 1255,1120 1280,1120 1305,1120 1330,1120 1230,1145 1255,1145 1280,1145 1305,1145 1330,1145 1230,1170 1255,1170 1280,1170 1305,1170 1330,1170 1230,1195 1255,1195 1280,1195 1305,1195 1330,1195 1230,1220 1255,1220 1280,1220 1305,1220 1330,1220 1230,1245 1255,1245 1280,1245 1305,1245 1330,1245 1230,1270 1255,1270 1280,1270 1305,1270 1330,1270
NetQ7_1: Q7.2 U2.6 | length 362.6
  Component Side w10: v1(1340,780) 1360,780 1411.65,831.65 1411.65,848.35 1392.8,867.2 U2.6@1370.14,867.2
  Solder Side w10: v1(1340,780) 1340,631.5 1366.5,605 Q7.2
NetQ8_1: Q8.1 Q9.3 R40.1 | length 217.6
  Solder Side w10: R40.1 872.56,832.28 Q8.1 951.54,753.3 Q9.3
NetQ8_3: Q8.3 R21.2 U2.2 | length 445.9
  Component Side w10: v1(895,840) 895,845 899,849 999,849 1042.8,892.8 1160,892.8 ; R21.2 1140,912.8 1160,892.8 ; U2.2 1160,892.8
  Solder Side w10: Q8.3 890,870.75 890,845 v1(895,840)
NetQ9_1: Q9.1 R41.2 U1.17 | length 220.4
  Solder Side w10: U1.17 739.88,780 787.52,780 805,762.52 805,727.28 R41.2 847.87,684.41 Q9.1
NetR2_2: R2.2 U1.44 | length 504.5
  Component Side w10: R2.2 258.17,822.74 258.17,696.83 405,550 v1(405,525)
  Solder Side w10: v1(405,525) 431.1,498.9 U1.44
NetR3_2: R3.2 U1.45 | length 511.4
  Component Side w10: R3.2 220,712.37 379,553.37 v1(379,525)
  Solder Side w10: v1(379,525) 379,521.3 411.42,488.88 U1.45
NetR5_2: BOOT.1 BOOT.2 R5.2 U1.60 | length 314.9
  Component Side w10: R5.2 310.35,739.57 318.76,739.09 329.29,738.5 BOOT.1@490.71,738.5
  Solder Side w10: U1.60 318.9,678.9 335,695 v1(335,740)
NetR7_1: R7.1 R13.2 U1.9 | length 1154.1
  Component Side w10: R7.1 30,1482.28 30,1380.32 27.46,1377.78 27.46,1242.54 v1(30,1240)
  Solder Side w10: v1(30,1240) 30,1047.37 73.37,1004 146.63,1004 196.31,1053.69 456.31,1053.69 509.84,1000.16 U1.9
NetR8_1: R8.1 R14.2 U1.11 | length 679
  Component Side w10: v1(497.28,1092.28) R8.1
  Solder Side w10: v1(497.28,1092.28) 497.28,1057.97 549.21,1006.04 U1.11
NetR9_1: R9.1 R15.2 U1.15 | length 943.5
  Component Side w10: v1(950,1090) 967.28,1107.28 R15.2
  Solder Side w10: U1.15 627.95,947.95 760,1080 940,1080 v1(950,1090)
NetR10_3: R10.3 U7.8 | length 144.8
  Solder Side w10: U7.8 189.65,1269.65 210.25,1290.25 R10.3
NetR10_4: R10.4 U7.1 | length 118.6
  Solder Side w10: U7.1 146.39,1146.39 167.36,1167.36 R10.4
NetR11_3: R11.3 U8.8 | length 115.6
  Solder Side w10: U8.8 659.65,1269.65 ; 680.25,1290.25 R11.3
NetR11_4: R11.4 U8.1 | length 118.6
  Solder Side w10: U8.1 616.39,1146.39 637.36,1167.36 R11.4
NetR12_3: R12.3 U9.8 | length 144.8
  Solder Side w10: U9.8 1129.65,1269.65 1150.25,1290.25 R12.3
NetR12_4: R12.4 U9.1 | length 118.6
  Solder Side w10: U9.1 1086.39,1146.39 1107.36,1167.36 R12.4
NetU1_34: U1.34 U6.6 | length 1169.1
  Component Side w10: v1(625.96,684.04) 657,715.08 657,979.37 706.63,1029 956.63,1029 1029.25,1101.62 U6.6
  Solder Side w10: v1(625.96,684.04) 627.95,682.05 U1.34
NetU1_35: U1.35 U5.6 | length 880.9
  Component Side w10: U5.6 559.25,1010.75 601,969 601,867.42 594,860.42 594,686 v1(595,685)
  Solder Side w10: v1(595,685) 608.27,671.73 U1.35
NetU1_36: U1.36 U4.6 | length 1228.6
  Component Side w10: U4.6 89.25,1198.38 146,1141.63 146,1086.63 196.63,1036 481.79,1036 536,981.79 536,714 v1(565,685)
  Solder Side w10: v1(565,685) 588.58,661.42 U1.36
NetU1_41: U1.41 U6.5 | length 1223.2
  Component Side w10: v1(615,745) 641,771 641,986 700,1045 950,1045 997.76,1092.76 U6.5
  Solder Side w10: U1.41 490.16,468.36 515,493.2 515,665 595,745 v1(615,745)
NetU1_42: U1.42 U5.5 | length 909.3
  Component Side w10: U5.5 527.76,1012.66 552,988.42 552,760.33 565,747.33 v1(565,745)
  Solder Side w10: U1.42 470.47,650.47 v1(565,745)
NetU1_43: U1.43 U4.5 | length 1238
  Component Side w10: U4.5 57.76,1207.24 130,1135 130,1080 190,1020 475.16,1020 495.76,999.41 495.76,998.99 502.56,992.18 502.98,992.18 515,980.16 v1(515,745)
  Solder Side w10: U1.43 450.79,680.79 v1(515,745)
QUAD_A: ENCODER.3 U1.38 | length 527.2
  Solder Side w10: U1.38 549.21,360.79 575.03,334.97 640.03,334.97 654,321 654,283.37 684.37,253 791.79,253 838.79,300 894.9,300 ENCODER.3
QUAD_B: ENCODER.2 U1.37 | length 413.8
  Solder Side w10: U1.37 568.9,363.73 581.66,350.97 646.66,350.97 670,327.63 670,290 691,269 785.16,269 ENCODER.2
SA: C18.1 D3.1 Q1.2 Q4.3 R7.2 R28.1 U4.4 | length 685.9
  Component Side w10: C18.1@193.76,1495 244.54,1545.79
  Component Side w15: U4.4 57.76,1471.09 155,1568.33 155,1705 175,1725 245,1725
  Component Side w40: Q4.3@251.39,1077.83 338.01,1077.83 Q4.3@424.62,1077.83
  other v1: 240,1629.37
SB: C19.1 D4.1 Q2.2 Q5.3 R8.2 R29.1 U5.4 | length 795.1
  Component Side w10: C19.1@663.76,1495 714.54,1545.79 Q2.2@714.54,1607.09 ; Q2.2@694.54,1742.91 694.54,1725 694.54,1715 714.54,1715
  Component Side w15: U5.4 527.76,1471.09 625,1568.33 625,1705 645,1725 694.54,1725 715,1725
  Component Side w40: Q5.3@721.39,1077.83 808.01,1077.83 Q5.3@894.62,1077.83
  other v1: 710,1629.37
SC: C20.1 D5.1 Q3.2 Q6.3 R9.2 R30.1 U6.4 | length 764.6
  Component Side w10: C20.1@1133.76,1495 1184.54,1545.79 Q3.2@1184.54,1607.09 ; 1184.54,1725 Q3.2@1184.54,1742.91
  Component Side w15: U6.4 997.76,1471.09 1095,1568.33 1095,1705 1115,1725 1184.54,1725
  Component Side w40: Q6.3@1191.39,1077.83 1278.01,1077.83 Q6.3@1364.62,1077.83
  other v1: 1240,1629.37
SER_RX: COMM.3 R25.1 U1.59 | length 952.9
  Component Side w10: COMM.3 470,132.38 479.57,141.95 v1(479.57,225)
  Solder Side w10: U1.59 249.21,659.21 222.37,632.37 222.37,485 143,405.63 143,264.67 208.17,199.5 454.07,199.5 v1(479.57,225)
SER_TX: COMM.2 R24.1 U1.58 | length 804.6
  Component Side w10: COMM.2 400,126.36 v1(400,225)
  Solder Side w10: U1.58 254.06,639.53 238.37,623.84 238.37,478.37 159,399 159,271.3 214.8,215.5 390.5,215.5 v1(400,225)
USB_DM: JP3.D- R2.1 | length 163
  Component Side w10: JP3.D- 204.41,970.59 258.76,916.24 258.76,861.24 R2.1
USB_DP: JP3.D+ R3.1 | length 121.2
  Component Side w10: JP3.D+ 205,945 220,930 R3.1
VCC: BOOT.3 BOOT.4 C1.2 C2.2 C3.2 C4.2 C5.2 C6.2 C9.1 C21.1 C22.1 C36.2 C41.2 COMM.4 D2.2 D11.1 ENCODER.8 L2.2 R1.2 R24.2 R25.2 R26.2 R40.2 U1.1 U1.13 U1.19 U1.32 U1.48 U1.64 U3.5 U7.6 U7.7 U8.6 U8.7 U9.6 U9.7 U10.3 | length 1495.1
  Component Side w10: BOOT.4 371.79,759 438.7,759 451,771.3 451,781.79 BOOT.3 ; v1(493,510) 493.4,510 500,503.4 U3.5 ; R26.2 v1(650,1080)
  Solder Side w10: v1@110.25,1219.75 v1(110.25,1215.5) 95.21,1230.53 U7.6 U7.7 ; D2.2 111.46,741.46 v1(140,770) ; v1(195,800) 223.5,771.5 C2.2 234.53,771.5 248.39,757.64 U1.64 ; v1(310,830) 349.88,830 U1.1 ; U1.48 352.36,316.89 C3.2 ; C21.1 564.25,1040.75 595,1010 v1(620,1010) ; v1(580,880) C6.2 588.58,876.42 U1.13 ; v1@580.25,1219.75 v1(580.25,1215.5) 565.21,1230.53 U8.6 U8.7 ; U1.32 771.89,462.36 v1(774.25,460) ; U1.19 778.27,718.27 v1(780,720) ; v1(820,970) v1(820,1000) 868,1048 962.74,1048 987,1072.26 1009.26,1050 C22.1 ; 987,1074.67 987,1197 1017.15,1227.15 1017.85,1227.15 1035.21,1244.51 U9.6 U9.7
  other v1: 210,280 240,280 270,280 300,280 330,280 360,280 390,280 420,280 450,280 180,310 210,310 240,310 270,310 300,310 330,310 360,310 420,310 450,310 180,340 210,340 240,340 270,340 300,340 330,340 180,370 210,370 240,370 270,370 300,370 330,370 810,867.72 94.25,1050
VDD: C11.2 C12.2 C15.2 C23.1 C24.2 C25.2 C26.2 C27.1 C29.2 C43.2 D10.1 Q1.3 Q2.3 Q3.3 Q7.1 R4.2 R18.1 R21.1 U2.8 U3.2 U3.3 | length 203.4
  Component Side w10: R21.1 R4.2 1242.28,1030 1320,1030 v1(1330,1020)
  other v1: 700,290 730,290 700,320 730,320 700,350 730,350 700,380 730,380 700,410 730,410 1340,570 1370,570 1400,570 1340,600 1370,660 1400,660 1370,690 1400,690 1370,720 1400,720 1370,750 1400,750 1330,930 1360,930 1330,960 1330,990 1360,990 1360,1020 1390,1020 1400,1625 60,1705 1400,1705 60,1785 1400,1785 60,1865
pads on no net: D2.0 JP3.ID JP3.VBUS U1.2 U1.3 U1.4 U1.24 U1.25 U1.26 U1.29 U1.30 U1.33 U1.39 U1.46 U1.49 U1.50 U1.51 U1.52 U1.53 U1.54 U1.55 U3.7 U3.8 U7.4 U8.4 U9.4 U10.5 U10.8

## Polygon pours and split planes (outlines as drawn)
VDD on Component Side "VDD_L01_P046" (solid, remove dead copper, pour order 46): -91.99,1425 -91.99,1935 28.01,2055 1378.01,2055 1528.01,1905 1528.01,1425
GND on Ground Plane (split plane): 1429.92,1961.76 1429.92,66.25 1383.75,20.08 91.25,20.08 20.08,91.25 20.08,1955.74 84.26,2019.92 1371.76,2019.92
12V on Power Plane (split plane): 1124.91,1480.82 1124.91,799.18 945.82,620.09 865.09,620.09 865.09,785 865.09,845 865.09,1055 864.74,1057.61 864.03,1059.33 863.73,1060.04 862.13,1062.13 672.13,1252.13 670.04,1253.74 667.61,1254.74 665,1255.09 179.18,1255.09 20.08,1414.18 20.08,1529.91 1075.82,1529.91
VCC on Power Plane (split plane): 167.87,1237.87 169.96,1236.26 170.67,1235.97 172.39,1235.26 175,1234.91 660.82,1234.91 844.91,1050.82 844.91,845 844.91,785 844.91,610 844.91,509.18 775.82,440.09 690,440.09 687.39,439.74 684.96,438.74 682.87,437.13 662.87,417.13 661.26,415.04 660.26,412.61 659.91,410 659.91,280 660.26,277.39 661.26,274.96 662.87,272.87 702.87,232.87 704.96,231.26 706.68,230.55 707.39,230.26 710,229.91 1160,229.91 1162.61,230.26 1165.04,231.26 1167.13,232.87 1399.18,464.91 1429.92,464.91 1429.92,66.25 1383.75,20.08 91.25,20.08 20.08,91.25 20.08,1385.65
VDD on Power Plane (split plane): 1429.92,1961.76 1429.92,485.09 1395,485.09 1392.39,484.74 1390.67,484.03 1389.96,483.74 1387.87,482.13 1155.82,250.09 714.18,250.09 680.09,284.18 680.09,405.82 694.18,419.91 780,419.91 782.61,420.26 785.04,421.26 787.13,422.87 862.13,497.87 863.73,499.96 864.74,502.39 865.09,505 865.09,599.91 950,599.91 952.61,600.26 955.04,601.26 957.13,602.87 1142.13,787.87 1143.73,789.96 1144.74,792.39 1145.09,795 1145.09,1485 1144.74,1487.61 1144.45,1488.32 1143.73,1490.04 1142.13,1492.13 1087.13,1547.13 1085.04,1548.74 1082.61,1549.74 1080,1550.09 20.08,1550.09 20.08,1955.74 84.26,2019.92 1371.76,2019.92

## Keep-outs
Keep-Out Layer:
  lines w10: 1358.01,2035 1378.01,2035 ; 1378.01,2035 1445,1968.01 1445,60 1390,5 85,5 0,90 0,1956.99 78.01,2035 1378.01,2035

## Other copper
Component Side:
  region net GND: 335,880 335,920 300,920 290,930 290,950 270,950 270,880
  region net NetQ4_2: 248.01,1310 428.01,1310 428.01,1115 248.01,1115
  region net NetQ6_2: 1188.01,1310 1368.01,1310 1368.01,1115 1188.01,1115
  region net NetQ5_2: 718.01,1310 898.01,1310 898.01,1115 718.01,1115
  region net SC: 1400,1060 1400,1420 1380,1420 1380,1060
  region net SB: 930,1060 930,1420 910,1420 910,1060
  region net SA: 460,1060 460,1420 440,1420 440,1060
  region net 12V: 1070,1460 1110,1460 1110,1390 1080,1390 1080,1420 1070,1430
  region net 12V: 600,1460 640,1460 640,1390 610,1390 610,1420 600,1430
  region net 12V: 130,1460 170,1460 170,1390 140,1390 140,1420 130,1430
  region net 12V: 860,860 980,860 1040,920 1120,920 1120,990 860,990
  region net VDD: 1290,540 1420,540 1420,760 1360,760 1290,690
  region net VDD: 1310,1020 1330,1040 1410,1040 1410,990 1370,990 1360,980 1360,910 1340,910 1310,940
  region net NetD6_2: 860,640 1130,640 1130,500 860,500
  region net NetL2_1: 150,400 150,490 170,510 370,510 390,490 390,430 435,430 435,400
  region net VCC: 150,390 465,390 465,260 180,260 150,290
  region net VDD: 485,440 485,470 680,470 740,410 740,280 690,280 690,360 580,360 580,400 540,440
  region net SC: 1158.01,1755 1158.01,1405 1398.01,1405 1398.01,1506.99 1340,1565 1340,1835 1110,1835 1110,1803.01
  region net GND: 680,260 680,350 563.82,350 563.82,401.18 535,430 495,430 475,410 475,399 475,260
  region net SA: 218.01,1755 218.01,1405 458.01,1405 458.01,1506.99 400,1565 400,1835 170,1835 170,1803.01
  region net SB: 688.01,1755 688.01,1405 928.01,1405 928.01,1506.99 870,1565 870,1835 640,1835 640,1803.01
  region net VDD: 1372.34,1555 1418.01,1555 1418.01,1795 1372.34,1795
  region net GND: 550,508.17 550,555 450,555 450,538.01 450,493.01 470,493.01 470,518.01 481.99,530 505,530 526.83,508.17
  region net GND: 1154.51,540 1280,540 1280,850 1060,850 1020,810 1020,650 1154.51,650
  region net SC: 1340,1835 1340,1975 ccw(c1300,1975) 1300,2015 1150,2015 ccw(c1150,1975) 1110,1975 1110,1835
  region net SB: 870,1835 870,1975 ccw(c830,1975) 830,2015 680,2015 ccw(c680,1975) 640,1975 640,1835
  region net SA: 400,1835 400,1975 ccw(c360,1975) 360,2015 210,2015 ccw(c210,1975) 170,1975 170,1835
Solder Side:
  region net NetQ4_2: 260,1115 485,1115 485,1220 420,1285 260,1285
  region net NetQ5_2: 730,1115 955,1115 955,1220 890,1285 730,1285
  region net GND: 820,730 875,730 875,810 855,810 820,775
  region net NetQ6_2: 1200,1115 1425,1115 1425,1220 1360,1285 1200,1285
  region net 12V: 870,900 960,900 990,930 1060,930 1070,920 1310,920 1310,980 1250,980 1240,990 870,990
  region net GND: 1020,650 1120,650 1150,680 1150,780 1310,780 1340,810 1430,810 1430,900 1070,900 1070,840 1050,820 1020,820
  region net VDD: 1360,640 1410,640 1410,770 1360,770
  region net VDD: 1320,910 1420,910 1420,1040 1320,1040
  region net NetD6_2: 1314.51,770 1314.51,584.51 1230,500 1020,500 1020,640 1120,640 1160,680 1160,770
Power Plane (plane layer: these items are gaps in the copper):
  lines w20: 0,1420 175,1245 665,1245 855,1055 855,845 855,785 855,610 ; 0,1485 0,1540 1080,1540 1135,1485 1135,795 950,610 855,610 ; 1445,475 1395,475 1160,240 710,240 670,280 670,410 690,430 780,430 855,505 855,610

## Silkscreen, mask and mechanical layers (free items; w line width, h text height)
Top Overlay:
  drawing of 4 lines, arcs and shapes, not listed
  text "εlectron" at 255,600 h120
  text "SCL" at 370,245 h20
  text "SDA" at 450,245 h20
  text "GND" at 290,25 h20
  text "TX" at 380,25 h20
  text "RX" at 460,25 h20
  text "3V3" at 530,25 h20
  text "CANH" at 725,25 h20
  text "CANL" at 835,25 h20
  text "CANH" at 995,25 h20
  text "CANL" at 1105,25 h20
Bottom Overlay:
  text "PWR" at 1420,1875 h50
  text "GND" at 140,1630 h50
  text "MOSI" at 1045,385 h20
  text "MISO" at 1140,385 h20
  text "GND" at 810,285 h20
  text "B" at 865,285 h20
  text "A" at 945,285 h20
  text "CLK" at 1205,285 h20
  text "CS" at 1270,285 h20
  text "3V3" at 1360,285 h20
  text "rESC v4.1 - Raphael Chang" at 1135,35 h30